# Allegro board Receiver2.brd
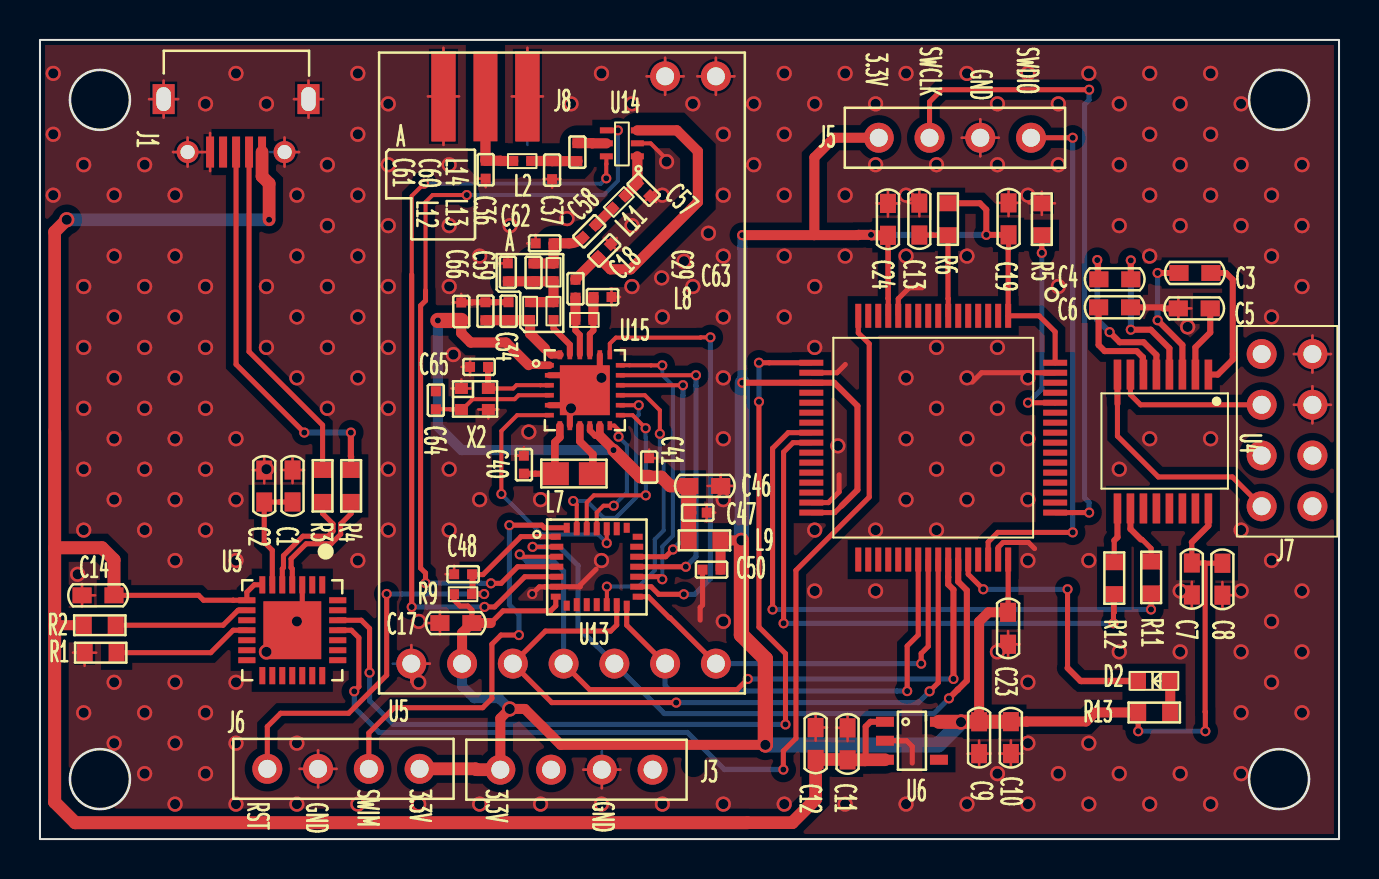
[diagram p0: board, top side]
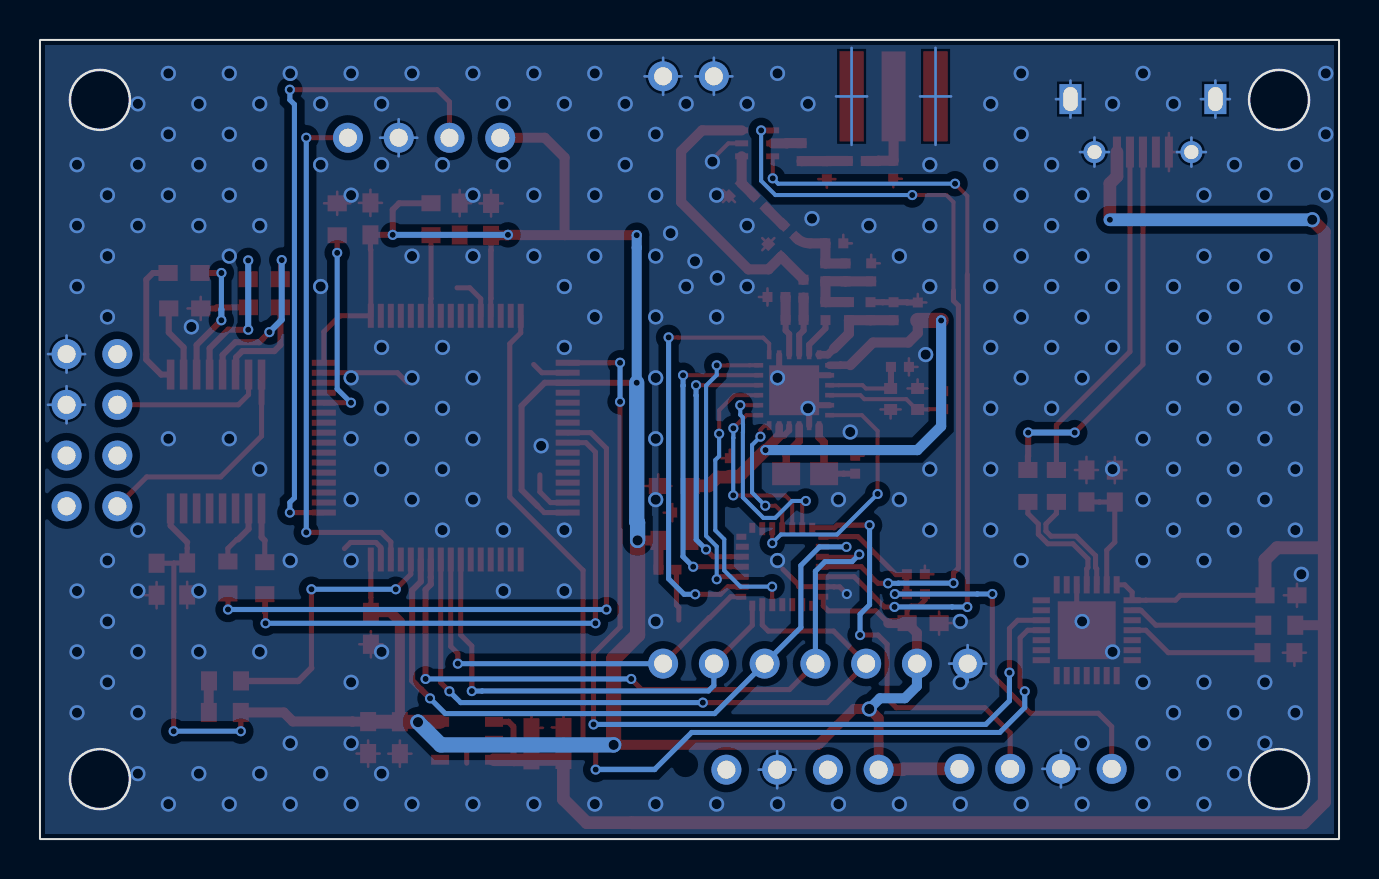
[diagram p1: board, bottom side, seen from below]

Outline 65 x 40 mm; copper layers: TOP, BOTTOM. Coordinates in mm from the lower left corner of the outline.
Outline path: rectangle 0,0 65,40 ; circle c3,37 r1.5 ; circle c3,37 r1.5 ; circle c3,3 r1.5 ; circle c3,3 r1.5 ; circle c62,37 r1.5 ; circle c62,37 r1.5 ; circle c62,3 r1.5 ; circle c62,3 r1.5

## Design rules (mm)
net group D: nets D+ D-
net group RF_CLASS2: nets N99630 N99706 N99710 N99714 N99794 N99798 N99834 N99974 N100014

## Placement (name value [footprint] x y rotation side)
C1  4.7uF/10V  [C0603]  12.64 18.47 270 top
C2  0.1uF/10V  [C0603]  11.22 18.47 270 top
C3  0.1uF/10V  [C0603]  56.99 28.34 0 top
C4  0.1uF/10V  [C0603]  52.98 28.02 0 top
C5  0.1uF/10V  [C0603]  56.96 26.56 0 top
C6  0.1uF/10V  [C0603]  54.57 26.62 180 top
C7  10uF/10V  [C0603]  57.64 13.82 270 top
C8  0.1uF/10V  [C0603]  59.16 12.21 90 top
C9  10uF/10V  [C0603]  46.99 5.87 270 top
C10  0.1uF/10V  [C0603]  48.58 4.28 90 top
C11  10uF/10V  [C0603]  40.41 3.97 90 top
C12  0.1uF/10V  [C0603]  38.81 5.58 270 top
C13  0.1uF/10V  [C0603]  44 31.83 270 top
C14  10uF/10V  [C0603]  3.7 12.2 180 top
C17  0.1uF/10V  [C0603]  20.01 10.81 0 top
C18  GRM1555C1H1R0CA01  [C0402]  28.56 29.78 225 top
C19  0.1uF/10V  [C0603]  48.47 31.84 270 top
C23  0.1uF/10V  [C0603]  48.44 9.75 90 top
C24  0.1uF/10V  [C0603]  42.43 31.82 270 top
C29  GRM1555C1H4R7CA01#  [C0402]  26.8 27.1 90 top
C34  GRM1555C1H820GA01  [C0402]  23.44 26.87 270 top
C35  GRM1555C1H101JA01#  [C0402]  26.89 34.84 270 top
C36  NC  [C0402]  22.3 33.06 90 top
C37  NC  [C0402]  25.63 33.03 90 top
C40  GRM155R61A474KE15D  [C0402]  24.21 19.19 270 top
C41  GRM155R61A105KE15D  [C0402]  30.48 19.07 270 top
C46  10uF  [C0603]  34.06 17.68 180 top
C47  0.1uF  [C0402]  33.36 16.34 180 top
C48  47P  [C0402]  20.72 13.26 0 top
C50  0.1uF  [C0402]  33.15 13.48 0 top
C57  GRM1555C1H8R2BA01#  [C0402]  29.89 32.82 315 top
C58  GRM1555C1H101JA01  [C0402]  27.16 30.1 45 top
C59  GRM155R71C473KA01J  [C0402]  22.29 26.87 270 top
C60  GRM1555C1H3R6BA01D  [C0402]  24.69 28.81 270 top
C61  NC  [C0402]  23.41 28.82 270 top
C62  GRM1555C1H120GA01  [C0402]  24.8 29.82 0 top
C63  GRM1555C1H3R9BA01#  [C0402]  28.6 27.13 180 top
C64  8.2P  [C0402]  19.81 21.52 90 top
C65  8.2P  [C0402]  22.42 23.63 180 top
C66  GRM155R71C104KA88D  [C0402]  21.08 26.86 270 top
D2  F5F1  [LED0603]  56.54 7.92 180 top
J1  CON9  [MICROUSB]  8.51 34.39 0 top
J3  -  [CON4]  19 3.51 180 top
J5  -  [CON4]  41.97 35.1 0 top
J6  -  [CON4]  23.03 3.47 0 top
J7  HEADER 4X2  [CON4X2]  61.13 24.28 0 top
J8  ANT_SMA  [SMA-KE]  22.29 37.18 90 top
L2  CRCW04020000Z0ED  [R0402]  24.58 33.94 180 top
L7  MLZ2012M150W  [R0805]  25.76 18.29 0 top
L8  LQW15AN33NH00D  [R0402]  27.69 25.99 180 top
L9  33nH  [R0603]  34.05 14.95 180 top
L11  LQG15HN18NJ02D  [R0402]  28.65 31.57 45 top
L12  LQG15HS56NJ02D  [R0402]  24.52 26.88 270 top
L13  33nH  [R0402]  25.7 25.98 90 top
L14  LQG15HS8N2J02D  [R0402]  25.7 27.92 90 top
R1  10K  [R0603]  2.23 9.33 0 top
R2  10K  [R0603]  2.19 10.7 0 top
R3  49.9  [R0603]  14.14 16.88 90 top
R4  49.9  [R0603]  15.57 16.88 90 top
R5  100K  [R0603]  50.13 30.22 90 top
R6  10K  [R0603]  45.43 30.23 90 top
R9  10K  [R0402]  21.62 12.26 180 top
R11  0  [R0603]  55.6 12.29 90 top
R12  0  [R0603]  53.75 12.26 90 top
R13  1K  [R0603]  54.95 6.34 0 top
U3  -  [CP2102]  12.62 10.45 270 top
U4  sipex3232eeA  [SIPEX3232EE]  58.46 23.25 270 top
U5  -  [APC340]  18.58 8.78 180 top
U6  XC6234H331VR-G/TPS780330200DDCT  [SOT-23-5]  42.28 5.87 270 top
U10  STM32L431rct6  [LQFP-64]  44.7 20.09 270 top
U13  STM8L151G6U6  [QFN28_NOLEAD_0_5]  27.86 13.63 0 top
U14  PE4259  [SC-70]  29.89 34.17 180 top
U15  SX1268  [QFN4X4]  27.26 22.47 0 top
X2  EXS00A-CS06465  [2_0X1_6]  21.09 21.5 0 top

## Library data of the parts
C1-C6 C8 C10 C12 C13 C17-C19 C23 C24 C29 C34-C37 C40 C41 C46-C48 C50 C57-C66 = CAP NP
C7 C9 C11 C14 = CAP POL
D2 = F5F1_0
J1 = CON9
J3 J5 J6 = CON4
J7 = HEADER 4X2
J8 = ANT_SMA
L2 L7-L9 L11-L14 = INDUCTOR
R1-R6 R11 R12 = R
R9 R13 = RESISTOR
U3 = CP2012_8
U4 = sipex3232ee
U5 = APC340_0
U6 = XC6234H331VR_2
U10 = STM32L431rct6_0
U13 = STM8L151G6U6
U14 = PE4259
U15 = SX1268
X2 = CRY_0

## Footprints (pads in the part's own frame, mm; a bottom-side part is the same pattern mirrored in y, then rotated)
2_0X1_6
  rect 0.65x0.55 smd: 1(0,0) 2(1.35,0) 3(1.35,1.05) 4(0,1.05)
APC340
  round 1.5 hole 0.9: 1(0,0) 2(-2.54,0) 3(-5.08,0) 4(-7.62,0) 5(-10.16,0) 6(-12.7,0) 7(-15.24,0) 8(-15.24,-29.4) 9(-12.7,-29.4)
C0402
  rect 0.5x0.5 smd: 1(0,0) 2(0.9,0)
C0603
  rect 0.96x0.8 smd: 1(0,0) 2(1.6,0)
CON4
  round 1.5 hole 0.9: 1(0,0) 2(2.54,0) 3(5.08,0) 4(7.62,0)
CON4X2
  round 1.5 hole 0.9: 1(0,0) 2(0,-2.54) 3(0,-5.08) 4(0,-7.62) 5(2.54,-7.62) 6(2.54,-5.08) 7(2.54,-2.54) 8(2.54,0)
CP2102
  rect 0.86x0.3 smd: 1(-2.273,1.5) 2(-2.273,1) 3(-2.273,0.5) 4(-2.273,0) 5(-2.273,-0.5) 6(-2.273,-1) 7(-2.273,-1.5) 15(2.273,-1.5) 16(2.273,-1) 17(2.273,-0.5) 18(2.273,0) 19(2.273,0.5) 20(2.273,1) 21(2.273,1.5)
  rect 0.3x0.86 smd: 8(-1.5,-2.273) 9(-1,-2.273) 10(-0.5,-2.273) 11(0,-2.273) 12(0.5,-2.273) 13(1,-2.273) 14(1.5,-2.273) 22(1.5,2.273) 23(1,2.273) 24(0.5,2.273) 25(0,2.273) 26(-0.5,2.273) 27(-1,2.273) 28(-1.5,2.273)
  rect 2.9x2.9 smd: 29(0,0)
LED0603
  rect 0.8x0.96 smd: 1(0,0) 2(1.6,0)
LQFP-64
  rect 1.2x0.3 smd: 1(-6.1,3.75) 2(-6.1,3.25) 3(-6.1,2.75) 4(-6.1,2.25) 5(-6.1,1.75) 6(-6.1,1.25) 7(-6.1,0.75) 8(-6.1,0.25) 9(-6.1,-0.25) 10(-6.1,-0.75) 11(-6.1,-1.25) 12(-6.1,-1.75) 13(-6.1,-2.25) 14(-6.1,-2.75) 15(-6.1,-3.25) 16(-6.1,-3.75) 33(6.1,-3.75) 34(6.1,-3.25) 35(6.1,-2.75) 36(6.1,-2.25) 37(6.1,-1.75) 38(6.1,-1.25) 39(6.1,-0.75) 40(6.1,-0.25) 41(6.1,0.25) 42(6.1,0.75) 43(6.1,1.25) 44(6.1,1.75) 45(6.1,2.25) 46(6.1,2.75) 47(6.1,3.25) 48(6.1,3.75)
  rect 0.3x1.2 smd: 17(-3.75,-6.1) 18(-3.25,-6.1) 19(-2.75,-6.1) 20(-2.25,-6.1) 21(-1.75,-6.1) 22(-1.25,-6.1) 23(-0.75,-6.1) 24(-0.25,-6.1) 25(0.25,-6.1) 26(0.75,-6.1) 27(1.25,-6.1) 28(1.75,-6.1) 29(2.25,-6.1) 30(2.75,-6.1) 31(3.25,-6.1) 32(3.75,-6.1) 49(3.75,6.1) 50(3.25,6.1) 51(2.75,6.1) 52(2.25,6.1) 53(1.75,6.1) 54(1.25,6.1) 55(0.75,6.1) 56(0.25,6.1) 57(-0.25,6.1) 58(-0.75,6.1) 59(-1.25,6.1) 60(-1.75,6.1) 61(-2.25,6.1) 62(-2.75,6.1) 63(-3.25,6.1) 64(-3.75,6.1)
MICROUSB
  rect 0.4x1.55 smd: 1(2.6,0) 2(1.95,0) 3(1.3,0) 4(0.65,0) 5(0,0)
  round 1.1 hole 0.71: 6(-1.125,0) 7(3.725,0)
  rect 1.1x1.5 hole 0.72x1.2: 8(-2.325,2.65) 9(4.925,2.65)
QFN4X4
  rect 0.45x0.23 smd: 1(-1.775,1.25) 2(-1.775,0.75) 3(-1.775,0.25) 4(-1.775,-0.25) 5(-1.775,-0.75) 6(-1.775,-1.25) 13(1.775,-1.25) 14(1.775,-0.75) 15(1.775,-0.25) 16(1.775,0.25) 17(1.775,0.75) 18(1.775,1.25)
  rect 0.23x0.45 smd: 7(-1.25,-1.775) 8(-0.75,-1.775) 9(-0.25,-1.775) 10(0.25,-1.775) 11(0.75,-1.775) 12(1.25,-1.775) 19(1.25,1.775) 20(0.75,1.775) 21(0.25,1.775) 22(-0.25,1.775) 23(-0.75,1.775) 24(-1.25,1.775)
  rect 2.5x2.5 smd: 25(0,0)
QFN28_NOLEAD_0_5
  rect 0.5x0.3 smd: 1(-2.05,1.5) 7(-2.05,-1.5) 15(2.05,-1.5) 21(2.05,1.5)
  rect 0.65x0.3 smd: 2(-2,1) 3(-2,0.5) 4(-2,0) 5(-2,-0.5) 6(-2,-1) 16(2,-1) 17(2,-0.5) 18(2,0) 19(2,0.5) 20(2,1)
  rect 0.3x0.5 smd: 8(-1.5,-1.95) 14(1.5,-1.95) 22(1.5,1.95) 28(-1.5,1.95)
  rect 0.3x0.65 smd: 9(-1,-1.9) 10(-0.5,-1.9) 11(0,-1.9) 12(0.5,-1.9) 13(1,-1.9) 23(1,1.9) 24(0.5,1.9) 25(0,1.9) 26(-0.5,1.9) 27(-1,1.9)
R0402
  rect 0.5x0.5 smd: 1(0,0) 2(0.9,0)
R0603
  rect 0.8x0.96 smd: 1(0,0) 2(1.6,0)
R0805
  rect 1.4x1.15 smd: 1(0,0) 2(1.9,0)
SC-70
  rect 0.65x0.3 smd: 1(0,0) 2(0,-0.65) 3(0,-1.3) 4(1.55,-1.3) 5(1.55,-0.65) 6(1.55,0)
SIPEX3232EE
  rect 1.5x0.38 smd: 1(0,0) 2(0,-0.65) 3(0,-1.3) 4(0,-1.95) 5(0,-2.6) 6(0,-3.25) 7(0,-3.9) 8(0,-4.55) 9(6.7,-4.55) 10(6.7,-3.9) 11(6.7,-3.25) 12(6.7,-2.6) 13(6.7,-1.95) 14(6.7,-1.3) 15(6.7,-0.65) 16(6.7,0)
SMA-KE
  rect 4.5x1.2 smd: 1(0,0) 2(0,2.1) 3(0,-2.1) 4(0,2.1) 5(0,-2.1)
SOT-23-5
  rect 0.5x0.9 smd: 1(0,0) 2(0.95,0) 3(1.9,0) 4(1.9,2.7) 5(0,2.7)

## Nets
GND: C1.1 C2.1 C5.1 C6.1 C7.2 C8.1 C9.2 C10.1 C11.2 C12.1 C13.1 C14.2 C17.1 C18.1 C19.1 C23.1 C24.1 C34.1 C36.1 C37.1 C40.1 C41.1 C46.1 C47.1 C48.1 C50.1 C57.2 C59.1 C61.1 C62.1 C63.1 C65.2 C66.1 J1.5 J1.6 J1.7 J1.8 J1.9 J3.3 J5.3 J6.3 J7.7 J7.8 J8.2(GND#2) J8.3(GND#3) J8.4(GND#4) J8.5(GND#5) R1.1 R5.2 U3.3(GND#3) U3.29(GND#29) U5.1(GND#1) U5.8(GND#8) U5.9(GND#9) U6.2(VSSS) U10.12(VSSA/VREF) U10.18(VSS#18) U10.31(VSS#31) U10.47(VSS#47) U10.63(VSS#63) U13.6(VSS1) U14.2(GND) U15.2(GND#2) U15.5(GND#5) U15.8(GND#8) U15.20(GND#20) U15.25(GND#25) X2.2(G#2) X2.4(G#4)
VCC: C11.1 C12.2 C14.1 J1.1 R2.1 U3.7(REGIN) U3.8(VBUS) U6.1(VIN) U6.3(CE)
VCC_3.3V: C7.1 C8.2 C9.1 C10.2 C17.2 C19.2 C23.2 C24.2 C50.2 J3.1 J5.1 J6.1 L9.1 R6.2 R9.2 R13.1 U4.16(VCC) U5.2(VCC) U6.5(VOUT) U10.1(VBAT) U10.13(VDDA/VREF+) U10.19(VDD#19) U10.32(VDD#32) U10.48(VDD#48) U10.64(VDD#64) U13.7(VDD1)
VCC_RF: C41.2 C46.2 C47.2 C66.2 L9.2 U15.1(VDD_IN) U15.10(VBAT) U15.11(VBAT_IO)
BUSY: U13.27(PC6) U15.14(BUSY)
COM_RX: R12.1 U10.25(PC5)
COM_TX: R11.1 U10.24(PC4)
D+: R4.1 U3.4(D+)
D-: R3.1 U3.5(D-)
DIO1: U13.26(PC5) U15.13(DIO1)
DIO2: U13.25(PC4) U15.12(DIO2/DATA)
DIO3: U13.24(PC3) U15.6(DIO3)
LORA_A: U5.3(SET_A) U10.41(PA8) U13.13(PB1)
LORA_AUX: U5.6(AUX) U10.39(PC8) U13.14(PB2)
LORA_B: U5.7(SET_B) U10.40(PC9) U13.15(PB3)
LORA_RST: U13.12(PB0) U15.15(NRESET)
LORA_RXD: U5.4(RXD) U10.42(PA9) U13.3(PA3/UART1_RXD)
LORA_TXD: U5.5(TXD) U10.43(PA10) U13.2(PA2/UART1_TXD)
RS232_RX: J7.4 U4.8(R2IN)
RS232_TX: J7.2 U4.7(T2OUT)
RST: C48.2 J3.4 R9.1 U13.1(NRST)
RXD: U3.26(TXD) U10.17(PA3)
RXEN: U13.4(PA4) U14.4(CTRL)
SCLK: J5.2 U10.49(PA14)
SPI_MISO: U13.19(PB7/SPI_MISO) U15.16(MISO)
SPI_MOSI: U13.18(PB6/SPI_MOSI) U15.17(MOSI)
SPI_NSS: U13.16(PB4/SPI_NSS) U15.19(NSS)
SPI_SCK: U13.17(PB5/SPI_SCK) U15.18(SCK)
SWDIO: J5.4 U10.46(PA13)
SWIM: J3.2 U13.28(PA0)
TXD: U3.25(RXD) U10.16(PA2)
TXEN: U13.5(PA5) U14.6(VDD)
N58413: C1.2 C2.2 U3.6(VDD)
N58587: R1.2 U3.11(\S\U\S\P\E\N\D\)
N58599: R2.2 U3.9(RST)
N58623: J1.2 R3.2
N58627: J1.3 R4.2
N59257: D2.1(ANODE) R13.2
N59265: D2.2(CATHODE) U10.44(PA11)
N59291: C13.2 R6.1 U10.7(NRST)
N59847: R5.1 U10.60(PH3/BOOT0)
N76001: C3.2 U4.1(C1+)
N76005: C3.1 U4.3(C1-)
N76017: C4.2 U4.4(C2+)
N76021: C4.1 U4.5(C2-)
N76033: C5.2 U4.2(V1+)
N76041: C6.2 U4.6(V-)
N76125: R11.2 U4.10(T2IN)
N99610: L13.1 U15.23(RF_O)
N99630: C60.2 C61.2 L12.1 L13.2 L14.1
N99650: C34.2 C59.2 L12.2 U15.24(VR_PA)
N99706: C35.1 U14.5(RFC)
N99710: C35.2 C37.2 L2.1
N99714: C36.2 J8.1(ANT) L2.2
N99794: C18.2 C29.2 U14.3(RF2)
N99798: C29.1 L8.2 U15.22(RFI_N)
N99834: C63.2 L8.1 U15.21(RFI_P)
N99974: C58.1 C60.1 C62.2 L14.2
N100014: C57.1 L11.2 U14.1(RF1)
N100088: C58.2 L11.1
N100384: C64.1 U15.4(XTB) X2.1(IN)
N100412: C65.1 U15.3(XTA) X2.3(OUT)
N100434: L7.2 U15.9(DCC_SW)
N100454: C40.2 L7.1 U15.7(VREG)
N758171: R12.2 U4.9(R2OUT)

Pads without a net: C64 2; J1 4; J6 2 4; J7 1 3 5 6; U3 1 2 10 12 13 14 15 16 17 18 19 20 21 22 23 24 27 28; U4 11 12 13 14 15; U6 4; U10 2 3 4 5 6 8 9 10 11 14 15 20 21 22 23 26 27 28 29 30 33 34 35 36 37 38 45 50 51 52 53 54 55 56 57 58 59 61 62; U13 8 9 10 11 20 21 22 23

## Via types
v1: diameter 0.508, hole 0.305, TOP to BOTTOM, 75 vias
v2: diameter 0.762, hole 0.508, TOP to BOTTOM, 242 vias

## Routing (per net, layer and track width the routed paths; a pad name or vN(x,y) marks a point on that pad's centre or on a via; arc(x,y) is an arc through that point)
GND: length 200.6
  TOP w0.127: 10.64,18.47 C2.1 ; C2.1 11.22,19.13 ; C2.1 11.22,17.81 ; 63.67,23.35 J7.8 ; J7.8 63.67,25.21 ; J7.8 64.6,24.28 ; J7.8 62.74,24.28 ; 57.64,11.56 C7.2 ; C7.2 57.06,12.22 ; C7.2 57.64,12.88 ; C47.1 33.79,16.34 ; C47.1 33.36,16.77 ; C47.1 33.36,15.91 ; C63.1 29.03,27.13 ; C63.1 28.6,26.71 ; C63.1 28.6,27.56 ; 21.09,23.63 C65.2 ; C65.2 21.52,23.21 ; C65.2 21.52,24.06 ; X2.4 21.09,23.01 ; X2.4 21.59,22.55 ; X2.4 20.58,22.55 ; 63.67,20.81 J7.7 ; J7.7 62.74,21.74 ; J7.7 63.67,22.67 ; J7.7 64.6,21.74 ; 47.86,9.75 C23.1 ; C23.1 48.44,10.41 ; C23.1 48.44,9.09 ; C23.1 49.02,9.75 ; 30.48,19.49 C41.1 30.91,19.07 ; C5.1 56.96,27.14 ; C5.1 57.61,26.56 ; C5.1 56.96,25.98 ; C24.1 42.43,32.48 ; C24.1 42.43,31.16 ; C24.1 43.01,31.82 ; C24.1 41.85,31.82 ; 20.01,10.23 C17.1 ; C17.1 20.01,11.39 ; C17.1 19.35,10.81 ; 31.28,37.25 U5.9 ; U5.9 32.21,38.18 ; U5.9 30.35,38.18 ; U5.9 31.28,39.11 ; C8.1 59.74,12.21 ; C8.1 59.16,11.55 ; C8.1 59.16,12.86 ; U5.1 18.58,9.71 ; U5.1 18.58,7.85 ; U5.1 19.51,8.78 ; J6.3 29.04,3.47 ; J6.3 27.19,3.47 ; J6.3 28.11,2.54 ; 23.78,19.19 C40.1 24.21,19.62 ; 25.63,32.61 C37.1 ; C37.1 25.2,33.03 ; C37.1 26.05,33.03 ; J1.7 12.24,35.12 ; J1.7 12.97,34.39 ; J1.7 12.24,33.66 ; 39.83,5.57 C11.2 ; C11.2 40.41,4.91 ; C11.2 40.41,6.22 ; 49.47,31.82 R5.2 ; R5.2 50.13,31.25 ; R5.2 50.79,31.82 ; R5.2 50.13,32.4 ; C18.1 28.86,29.48 ; C18.1 28.25,30.08 ; C18.1 28.86,30.08 ; 12.99,3.51 J3.3 ; J3.3 13.92,4.44 ; J3.3 13.92,2.59 ; J3.3 14.84,3.51 ; 2.1,11.62 C14.2 ; C14.2 2.1,12.78 ; C14.2 2.76,12.2 ; J1.9 13.44,37.97 ; J1.9 13.44,36.11 ; J1.9 14.17,37.04 ; J1.9 12.71,37.04 ; 20.29,13.26 C48.1 20.72,13.68 ; 22.98,28.82 C61.1 23.41,29.25 ; 12.64,17.82 C1.1 ; C1.1 12.06,18.47 ; C1.1 12.64,19.13 ; C1.1 13.22,18.47 ; 19.41,37.18 J8.2 ; J8.2 20.19,34.75 ; J8.2 20.97,37.18 ; J8.2 20.19,39.6 ; 44,31.18 C13.1 ; C13.1 43.42,31.83 ; C13.1 44,32.49 ; C19.1 49.04,31.84 ; C19.1 47.89,31.84 ; C19.1 48.47,32.5 ; C19.1 48.47,31.19 ; 22.3,32.63 C36.1 21.87,33.06 ; C57.2 30.83,31.88 ; C57.2 30.22,31.88 ; C57.2 30.83,32.49 ; 21.08,27.29 C66.1 20.65,26.86 ; 24.38,29.82 C62.1 24.8,30.25 ; R1.1 2.81,9.33 ; R1.1 1.66,9.33 ; R1.1 2.23,8.67 ; 48,4.28 C10.1 ; C10.1 48.58,3.62 ; C10.1 48.58,4.94 ; C10.1 49.16,4.28 ; C46.1 34.06,18.25 ; C46.1 33.4,17.68 ; C46.1 34.72,17.68 ; C46.1 34.06,17.1 ; 46.12,35.1 J5.3 ; J5.3 47.05,36.03 ; J5.3 47.05,34.18 ; J5.3 47.98,35.1 ; U5.8 34.75,38.18 ; U5.8 32.89,38.18 ; U5.8 33.82,39.11 ; U5.8 33.82,37.25 ; 8.51,33.44 J1.5 ; J1.5 8.13,34.39 ; J1.5 8.51,35.34 ; J1.6 8.12,34.39 ; J1.6 7.39,33.66 ; J1.6 6.66,34.39 ; J1.6 7.39,35.12 ; C9.2 47.57,4.27 ; C9.2 46.41,4.27 ; C9.2 46.99,3.61 ; C9.2 46.99,4.93 ; J1.8 6.19,37.97 ; J1.8 5.46,37.04 ; J1.8 6.92,37.04 ; J1.8 6.19,36.11 ; 23.61,37.18 J8.3 ; J8.3 24.39,39.6 ; J8.3 25.17,37.18 ; 21.93,21.5 X2.2 ; X2.2 22.44,21.05 ; X2.2 22.94,21.5 ; C12.1 38.81,6.24 ; C12.1 38.81,4.93 ; C12.1 39.39,5.58
  TOP w0.203: U14.2 30.56,34.82 31.21,34.17
  TOP w0.254: U10.63 47.11,23.34 46.64,22.87 ; 40.3,23.76 39.88,23.34 U10.18 ; U6.2 43.36,4.92 43.65,4.64 43.65,3.8 ; 44.13,27.59 43.49,27.59 42.95,27.05 U10.12 ; U10.47 47.95,14.6 48.19,14.85 49.46,14.85 49.77,14.54 ; U3.3 13.12,10.95 U3.29 ; C50.1 33.15,11.71 33.03,11.59 33.03,10.96 ; 39.99,18.23 39.99,17.38 39.45,16.84 U10.31 ; 27.83,13.5 27.03,12.71 27.03,12.63 U13.6 25.28,12.63 25.27,12.62 24.99,12.62 v1(24.63,12.27)
  TOP w0.305: 26.51,21.72 U15.8 ; 26.51,21.72 U15.5 ; 26.51,21.72 U15.25 ; U15.25 26.51,23.22 U15.2 ; U15.25 28.01,23.22 U15.20 ; C5.1 56.2,26.56 56.14,26.62 C6.1 ; C34.1 22.82,26.87 22.82,26.87 C59.1 21.62,26.87 21.61,26.86 C66.1
  BOTTOM w0.127: 62.74,24.28 J7.8 ; J7.8 63.67,25.21 ; J7.8 63.67,23.35 ; J7.8 64.6,24.28 ; 63.67,20.81 J7.7 ; J7.7 64.6,21.74 ; J7.7 62.74,21.74 ; J7.7 63.67,22.67 ; U5.1 19.51,8.78 ; U5.1 17.65,8.78 ; U5.1 18.58,7.85 ; U5.1 18.58,9.71 ; 13.92,2.59 J3.3 ; J3.3 13.92,4.44 ; J3.3 12.99,3.51 ; J3.3 14.84,3.51 ; J1.7 12.97,34.39 ; J1.7 12.24,33.66 ; J1.7 12.24,35.12 ; J1.7 11.51,34.39 ; 6.19,36.11 J1.8 ; J1.8 6.92,37.04 ; J1.8 6.19,37.97 ; J1.8 5.46,37.04 ; 46.12,35.1 J5.3 ; J5.3 47.98,35.1 ; J5.3 47.05,34.18 ; J5.3 47.05,36.03 ; 20.19,34.75 J8.2 ; J8.2 19.41,37.18 ; J8.2 20.97,37.18 ; J8.2 20.19,39.6 ; J1.9 14.17,37.04 ; J1.9 13.44,37.97 ; J1.9 13.44,36.11 ; J1.9 12.71,37.04 ; 24.39,34.75 J8.3 ; J8.3 23.61,37.18 ; J8.3 25.17,37.18 ; J8.3 24.39,39.6 ; 7.39,33.66 J1.6 ; J1.6 6.66,34.39 ; J1.6 7.39,35.12 ; J1.6 8.12,34.39 ; 33.82,37.25 U5.8 ; U5.8 34.75,38.18 ; U5.8 33.82,39.11 ; U5.8 32.89,38.18 ; 28.11,2.54 J6.3 ; J6.3 29.04,3.47 ; J6.3 27.19,3.47 ; J6.3 28.11,4.4 ; U5.9 32.21,38.18 ; U5.9 30.35,38.18 ; U5.9 31.28,39.11 ; U5.9 31.28,37.25
  vias: v2(0.66,38.33) v2(0.66,35.28) v2(0.66,32.23) v2(1.89,13.25) v2(2.19,33.75) v2(2.19,27.66) v2(2.19,24.61) v2(2.19,21.56) v2(2.19,18.51) v2(2.19,15.47) v2(2.19,6.32) v2(3.71,32.23) v2(3.71,29.18) v2(3.71,26.13) v2(3.71,23.09) v2(3.71,20.04) v2(3.71,16.99) v2(3.71,7.85) v2(3.71,4.8) v2(5.24,33.75) v2(5.24,27.66) v2(5.24,24.61) v2(5.24,21.56) v2(5.24,18.51) v2(5.24,15.47) v2(5.24,6.32) v2(5.24,3.27) v2(6.76,32.23) v2(6.76,29.18) v2(6.76,26.13) v2(6.76,23.09) v2(6.76,20.04) v2(6.76,16.99) v2(6.76,13.94) v2(6.76,7.85) v2(6.76,4.8) v2(6.76,1.75) v2(8.28,36.8) v2(8.28,27.66) v2(8.28,24.61) v2(8.28,21.56) v2(8.28,18.51) v2(8.28,15.47) v2(8.28,6.32) v2(8.28,3.27) v2(9.81,38.33) v2(9.81,20.04) v2(9.81,16.99) v2(9.81,13.94) v2(9.81,7.85) v2(9.81,4.8) v2(9.81,1.75) v2(11.33,36.8) v2(11.33,27.66) v2(11.33,24.61) v2(11.33,18.51) v2(11.33,9.37) v2(12.86,32.23) v2(12.86,29.18) v2(12.86,26.13) v2(12.86,23.09) v2(12.86,10.89) v2(12.86,4.8) v2(12.86,1.75) v2(14.38,33.75) v2(14.38,30.71) v2(14.38,27.66) v2(14.38,24.61) v2(14.38,21.56) v2(15.9,38.33) v2(15.9,35.28) v2(15.9,32.23) v2(15.9,29.18) v2(15.9,26.13) v2(15.9,23.09) v2(15.9,13.94) v2(15.9,1.75) v2(17.43,36.8) v2(17.43,33.75) v2(17.43,30.71) v2(17.43,27.66) v2(17.43,24.61) v2(17.43,21.56) v2(17.43,18.51) v2(17.43,15.47) v2(18.95,10.89) v2(18.95,7.85) v2(18.95,1.75) v2(20.48,33.75) v2(20.48,30.71) v2(20.48,27.66) v2(20.48,18.51) v2(20.48,15.47) v2(20.68,24.25) v2(22,29.18) v2(22,16.99) v2(22,1.75) v2(23.52,30.71) v2(24.46,20.38) v2(25.05,16.99) v2(25.05,1.75) v2(26.37,31.06) v2(26.57,36.8) v2(26.57,21.56) v2(28.1,38.33) v2(28.1,23.09) v2(28.1,13.94) v2(28.1,1.75) v2(29.62,36.8) v2(29.62,30.71) v2(29.62,27.66) v2(31.14,32.23) v2(31.11,28.09) v2(31.14,26.13) v2(31.14,1.75) v2(31.35,33.91) v2(32.23,28.92) v2(32.67,36.8) v2(32.67,27.66) v2(33.45,30.33) v2(34.19,35.28) v2(34.19,32.23) v2(34.19,29.18) v2(34.19,26.13) v2(34.19,23.09) v2(34.19,20.04) v2(34.19,16.99) v2(34.19,10.89) v2(34.19,1.75) v2(35.72,36.8) v2(35.72,33.75) v2(37.24,38.33) v2(37.24,35.28) v2(37.24,32.23) v2(37.24,29.18) v2(37.24,26.13) v2(37.24,1.75) v2(38.76,36.8) v2(38.76,27.66) v2(38.76,24.61) v2(38.76,15.47) v2(38.76,12.42) v2(39.92,19.68) v2(40.29,38.33) v2(40.29,32.23) v2(40.29,29.18) v2(40.29,1.75) v2(41.81,36.8) v2(41.81,33.75) v2(41.81,15.47) v2(41.81,12.42) v2(43.34,38.33) v2(43.34,32.23) v2(43.34,29.18) v2(43.34,23.09) v2(43.34,20.04) v2(43.34,16.99) v2(43.34,1.75) v2(44.86,33.75) v2(44.86,24.61) v2(44.86,21.56) v2(44.86,18.51) v2(44.86,15.47) v2(46.38,38.33) v2(46.38,29.18) v2(46.38,23.09) v2(46.38,20.04) v2(46.38,16.99) v2(46.38,1.75) v2(47.91,36.8) v2(47.91,33.75) v2(47.91,24.61) v2(47.91,21.56) v2(47.91,18.51) v2(47.91,9.37) v2(47.91,3.27) v2(49.43,38.33) v2(49.43,32.23) v2(49.43,23.09) v2(49.43,20.04) v2(49.43,16.99) v2(49.43,13.94) v2(49.43,7.85) v2(49.43,4.8) v2(49.43,1.75) v2(50.96,36.8) v2(50.96,33.75) v2(50.96,27.66) v2(50.96,3.27) v2(52.48,38.33) v2(52.48,13.94) v2(52.48,4.8) v2(52.48,1.75) v2(54,36.8) v2(54,33.75) v2(54,30.71) v2(54,18.51) v2(54,9.37) v2(54,3.27) v2(55.53,38.33) v2(55.53,35.28) v2(55.53,32.23) v2(55.53,29.18) v2(55.53,20.04) v2(55.53,1.75) v2(57.05,36.8) v2(57.05,33.75) v2(57.05,30.71) v2(57.05,12.42) v2(57.05,9.37) v2(57.05,3.27) v2(57.43,25.64) v2(58.58,38.33) v2(58.58,35.28) v2(58.58,32.23) v2(58.58,20.04) v2(58.58,1.75) v2(60.1,36.8) v2(60.1,33.75) v2(60.1,30.71) v2(60.1,15.47) v2(60.1,12.42) v2(60.1,9.37) v2(60.1,6.32) v2(60.1,3.27) v2(61.62,32.23) v2(61.62,29.18) v2(61.62,26.13) v2(61.62,13.94) v2(61.62,10.89) v2(61.62,7.85) v2(63.15,33.75) v2(63.15,30.71) v2(63.15,27.66) v2(63.15,12.42) v2(63.15,9.37) v2(63.15,6.32)
VCC: length 104.9
  TOP w0.254: U3.7 10.72,12.73 10.35,12.36 U3.8 9.67,11.95 9.66,11.96 8.18,11.96 7.94,12.2 C14.1 ; R2.1 2.19,10.78
  TOP w0.3: U6.1 41.55,5.87 41.31,5.63 41.31,3.99 41.29,3.97
  TOP w0.5: 0.73,10.67 0.76,10.7 R2.1
  TOP w0.635: v2(1.34,31) 0.73,30.39 0.73,20.41 ; J1.1 11.11,33.17 11.47,32.82 v1(11.47,31) ; 35.4,0.82 37.64,0.82 38.81,1.99 C12.2 40.39,3.98 C11.1 41.29,3.97 41.29,3.97 U6.3
  TOP w0.65: 0.73,14.56 0.75,14.58 3.1,14.58 3.7,13.98 C14.1 ; 0.73,14.56 0.73,20.41 ; 0.73,14.56 0.73,1.85 1.76,0.82 35.4,0.82
  BOTTOM w0.635: v2(1.34,31) v1(11.47,31)
VCC_3.3V: length 162.7
  TOP w0.254: R9.2 20.72,11.96 21.02,11.66 21.41,11.66 21.61,11.46 C17.2 ; C23.2 48.44,12.08 48.45,12.09 U10.48 ; 58.3,13.81 58.29,13.82 C7.1 57.64,14.55 57.63,14.55 57.63,14.85 ; 58.3,13.81 58.3,6.37 58.31,6.36 v1(58.31,5.4) ; 58.3,13.81 C8.2 ; 42.43,29.49 42.45,29.47 42.45,27.05 ; 42.43,29.49 C24.2 ; 42.43,29.49 42.43,27.06 42.45,27.05 ; C19.2 48.47,29.51 48.45,29.49 U10.1 49.99,26.19 50.8,25.39 U10.64 ; 40.11,16.68 39.77,16.34 U10.32 ; 22.56,10.81 23.17,11.42 25.56,11.42 25.81,11.68 U13.7 ; 42.45,27.05 U10.13 ; R13.1 v1(54.95,5.4)
  TOP w0.3: v1(35.14,22.84) U10.19 39.74,22.84 40.9,21.68 40.9,17.48 40.11,16.68 ; C19.2 v1(47.35,30.24) 47.35,31.5 47.03,31.83 R6.2
  TOP w0.305: 57.63,14.85 58.46,15.68 U4.16
  TOP w0.5: 38.74,30.23 40.94,30.23 40.95,30.24 v1(41.58,30.24) 41.61,30.22 C24.2 ; 38.74,30.23 38.75,30.24 38.75,34.12 39.74,35.1 J5.1 ; 38.74,30.23 v1(35.14,30.23) ; 46.07,5.87 v2(46.09,5.85) ; R13.1 52.8,6.34 52.35,5.89 49.37,5.89 49.36,5.88 C10.2 ; U5.2 21.12,10.32 C17.2 22.56,10.81 ; v2(36.3,4.71) 26.06,4.71 24.26,6.51 v2(23.51,6.51) 23.03,6.04 J6.1 ; v2(35.1,14.95) L9.1 C50.2 ; C23.2 47.46,11.35 46.99,10.88 C9.1
  TOP w0.635: J6.1 21.84,3.47 21.8,3.51 J3.1
  TOP w0.7: U6.5 46.11,5.87 46.11,5.87 C9.1 48.58,5.87 C10.2
  TOP w0.762: v2(35.1,14.95) 35.1,10.22 36.3,9.02 v2(36.3,4.71)
  BOTTOM w0.254: v1(54.95,5.4) v1(58.31,5.4)
  BOTTOM w0.3: v1(47.35,30.24) v1(41.58,30.24)
  BOTTOM w0.5: v2(23.51,6.51) 22.97,7.05 21.73,7.05 21.12,7.65 U5.2 ; v1(35.14,30.23) 35.14,29.6 35.14,29.6 v1(35.14,22.84)
  BOTTOM w0.762: v2(35.1,14.95) 35.1,15.84 35.14,15.88 v1(35.14,22.84) ; v2(46.09,5.85) 44.95,4.71 v2(36.3,4.71)
VCC_RF: length 31.5
  TOP w0.305: 28.01,20.18 28,20.19 27.78,20.19 27.51,20.46 U15.10
  TOP w0.381: 24.45,23.72 24.94,23.72 24.95,23.72 U15.1 ; 28.01,20.18 U15.11
  TOP w0.508: 24.45,23.72 23.32,24.85 21.55,24.85 21.08,25.33 C66.2 ; v1(28.7,19.47) 28.7,19.49 28.01,20.18
  TOP w0.635: v1(28.7,19.47) 30,18.17 ; 30,18.17 C41.2 ; 30,18.17 30.05,18.12 31.09,18.12 31.54,17.68 C46.2
  TOP w0.762: C46.2 C47.2 32.45,16.33 L9.2 ; C66.2 v1(19.91,25.96)
  BOTTOM w0.508: v1(28.7,19.47) 21.1,19.47 19.91,20.66 v1(19.91,25.96)
BUSY: length 11
  TOP w0.203: v1(29.96,21.72) U15.14 ; v1(26.68,16.92) 26.86,16.74 U13.27
  BOTTOM w0.203: v1(26.68,16.92) 27.37,16.92 28.21,16.08 28.8,16.08 29.83,17.1 29.83,20.36 29.82,20.36 29.82,20.76 29.83,20.77 29.83,21.1 29.96,21.23 v1(29.96,21.72)
COM_RX: length 29.1
  TOP w0.254: 53.71,11.31 53.71,12.23 53.74,12.26 ; 53.71,11.31 53.75,11.35 R12.1 ; 53.71,11.31 v1(53.71,10.8) ; U10.25 37.68,19.84 37.21,19.37 v1(37.21,10.8)
  BOTTOM w0.254: v1(37.21,10.8) v1(53.71,10.8)
COM_TX: length 30.1
  TOP w0.254: v1(36.66,11.49) 36.66,19.56 37.44,20.34 U10.24 ; R11.1 55.6,11.5 v1(55.59,11.49)
  BOTTOM w0.254: v1(36.66,11.49) v1(55.59,11.49)
D+: length 6.2
  TOP w0.254: U3.4 12.62,13.53 12.56,13.59 12.56,14.03 13.32,14.78 14.57,14.78 15.04,15.26 15.04,15.77 15.57,16.3 R4.1
D-: length 6.2
  TOP w0.254: R3.1 14.14,16.3 14.66,15.77 14.66,15.41 14.41,15.16 13.16,15.16 12.18,14.18 12.18,13.59 12.12,13.53 U3.5
DIO1: length 9.3
  TOP w0.203: U15.13 29.65,21.22 v1(30.3,20.56) ; v1(30.31,17.2) 27.71,17.2 27.36,16.85 U13.26
  BOTTOM w0.203: v1(30.31,17.2) 30.31,20.07 30.3,20.08 v1(30.3,20.56)
DIO2: length 6.6
  TOP w0.203: U13.25 27.86,16.35 28.2,16.69 v1(28.71,16.69) ; U15.12 28.52,20.7 28.74,20.7 28.95,20.49 v1(28.95,20.14)
  BOTTOM w0.203: v1(28.71,16.69) 29.37,17.35 29.37,19.72 v1(28.95,20.14)
DIO3: length 12.9
  TOP w0.203: U13.24 v1(28.36,14.81) ; U15.6 23.87,21.22 23.09,20.43 v1(23.09,17.27)
  BOTTOM w0.203: v1(28.36,14.81) 27.92,15.25 25.11,15.25 v1(23.09,17.27)
LORA_A: length 35.7
  TOP w0.254: v1(44.51,7.4) 44.95,7.83 U10.41 ; U13.13 28.86,10.71 28.56,10.41 25.29,10.41 U5.3 25.61,6.83 v1(31.83,6.83)
  BOTTOM w0.254: v1(31.83,6.83) 43.95,6.83 v1(44.51,7.4)
LORA_AUX: length 23.8
  TOP w0.254: U13.14 29.36,10.7 U5.6 ; v1(43.39,7.41) 43.39,9.66 43.95,10.22 U10.39
  BOTTOM w0.254: U5.6 31.28,7.69 31.55,7.41 42.88,7.41 42.88,7.41 v1(43.39,7.41)
LORA_B: length 20.9
  TOP w0.254: v1(44.09,8.78) 44.09,9.29 44.45,9.64 U10.40 ; U13.15 30.44,12.13 31.49,11.08 31.52,11.08 U5.7
  BOTTOM w0.254: U5.7 v1(44.09,8.78)
LORA_RST: length 14.2
  TOP w0.203: U13.12 28.37,11.74 v1(28.37,12.63) ; U15.15 30.27,22.22 31.02,21.47 v1(31.02,20.29)
  BOTTOM w0.203: v1(28.37,12.63) 29.95,12.63 30.76,13.45 30.76,15.01 31.21,15.45 31.21,18.97 31.02,19.17 v1(31.02,20.29)
LORA_RXD: length 35.5
  TOP w0.203: U13.3 24.12,14.13
  TOP w0.254: 45.75,8.05 45.71,8.01 v1(45.71,8.01) ; 24.12,14.13 v1(24.01,14.25) ; U5.4 27.5,7.48 34.88,7.48 v1(35.42,8.01)
  TOP w0.305: U10.42 45.45,13.11 45.45,12.74 45.71,12.48 v1(45.71,8.01)
  BOTTOM w0.254: v1(24.01,14.25) 24.36,13.89 25.72,13.89 26.2,13.41 U5.4 ; v1(45.71,8.01) v1(35.42,8.01)
LORA_TXD: length 35.1
  TOP w0.203: v1(24.65,14.63) 25.25,14.63 25.26,14.63 U13.2
  TOP w0.305: U10.43 45.95,12.88 46.38,12.45 46.38,7.93 45.93,7.48 45.92,7.48 v1(45.48,7.04)
  BOTTOM w0.254: v1(24.65,14.63) 25.99,14.63 26.93,13.69 26.93,10.59 U5.5 31.24,6.28 44.72,6.28 v1(45.48,7.04)
RS232_RX: length 11.7
  TOP w0.254: J7.4 59.66,18.13 55.96,18.13 53.91,20.17 53.91,21.8
  TOP w0.305: 53.91,21.8 U4.8
RS232_TX: length 7.8
  TOP w0.254: J7.2 55.07,21.74 54.56,22.25 U4.7
RST: length 26.2
  TOP w0.254: U13.1 25.04,15.13 25.03,15.14 24.07,15.14 22.17,13.24 21.66,13.24 21.66,12.26 v1(22.23,12.26) 22.22,12.26 R9.1 21.62,12.26 C48.2 ; v1(17.35,12.27) 17.35,8.2 15.44,6.3 12.04,6.3 11.38,5.63 J3.4
  BOTTOM w0.254: v1(17.35,12.27) 18.11,12.27 18.11,12.26 v1(22.23,12.26)
RXD: length 48
  TOP w0.254: U3.26 16.08,10.95 16.49,10.54 v1(16.49,8.33) ; U10.17 36.49,23.84 36.48,23.84 v1(35.98,23.84) ; v1(35.98,21.89) 35.98,10.61 37.3,9.28 v1(37.3,5.74)
  BOTTOM w0.254: v1(16.49,8.33) 16.49,6.92 17.67,5.74 v1(37.3,5.74) ; v1(35.98,21.89) v1(35.98,23.84)
RXEN: length 39.4
  TOP w0.203: 19.29,27.46 19.29,31.88 19.65,32.24 v1(21.36,32.24) ; v1(28.92,35.47) U14.4
  TOP w0.254: v1(22.57,12.8) 23.07,12.8 23.9,13.63 U13.4 ; v1(19.29,12.81) 19.29,13.32 19.04,13.56 19.04,26.7 19.29,26.95 19.29,27.46
  BOTTOM w0.203: v1(21.36,32.24) 28.2,32.24 28.92,32.95 v1(28.92,35.47)
  BOTTOM w0.254: v1(22.57,12.8) 22.06,12.8 22.05,12.81 v1(19.29,12.81)
SCLK: length 33.1
  TOP w0.254: J5.2 44.51,36.9 45.12,37.51 v1(52.5,37.51) ; v1(52.5,16.34) 51.65,16.34 51.65,16.34 U10.49
  BOTTOM w0.254: v1(52.5,37.51) 52.5,37 52.27,36.77 52.27,17.08 52.5,16.85 v1(52.5,16.34)
SPI_MISO: length 13.5
  TOP w0.203: U15.16 v1(32.17,22.72)
  TOP w0.254: U13.19 30.44,14.13 30.44,14.13 31.31,14.13 v1(31.67,14.5)
  BOTTOM w0.254: v1(32.17,22.72) 32.17,22.21 32.16,22.2 32.16,14.99 v1(31.67,14.5)
SPI_MOSI: length 16
  TOP w0.203: U15.17 v1(32.82,23.22)
  TOP w0.254: v1(32.32,13.63) 30.44,13.63 30.44,13.63 U13.18
  BOTTOM w0.254: v1(32.82,23.22) 32.82,22.7 32.83,22.7 32.83,14.14 v1(32.32,13.63)
SPI_NSS: length 22
  TOP w0.203: v1(33.55,25.11) 33.06,25.11 33.05,25.1 28.82,25.1 28.51,24.8 U15.19
  TOP w0.254: v1(32.22,12.25) 30.96,12.25 30.58,12.63 U13.16
  BOTTOM w0.254: v1(33.55,25.11) 33.55,13.03 32.77,12.25 v1(32.22,12.25)
SPI_SCK: length 14.6
  TOP w0.203: U15.18 29.49,23.72 29.49,23.72 30.57,23.72 30.57,23.71 v1(31.14,23.71)
  TOP w0.254: U13.17 30.44,13.13 30.44,13.13 31.01,13.13 v1(31.14,13)
  BOTTOM w0.203: v1(31.14,23.71) 31.14,23.23 31.67,22.7 31.67,15.18 31.14,14.64 v1(31.14,13)
SWDIO: length 27.1
  TOP w0.254: v1(51.68,15.35) 47.93,15.35 47.44,14.87 47.44,13.99 U10.46 ; J5.4 v1(51.68,35.1)
  BOTTOM w0.254: v1(51.68,35.1) v1(51.68,15.35)
SWIM: length 21.5
  TOP w0.254: v1(23.96,10.21) 23.07,10.21 22.61,9.75 22.61,7.03 22.15,6.57 17.72,6.57 16.46,5.31 J3.2 ; U13.28 25.24,15.58 25.11,15.71 v1(23.49,15.71)
  BOTTOM w0.254: v1(23.49,15.71) 23.49,11.73 23.96,11.25 v1(23.96,10.21)
TXD: length 55.2
  TOP w0.254: v1(15.73,7.39) 15.96,7.62 15.96,10.08 15.58,10.45 U3.25 ; U10.16 40.95,25.34 41.49,24.79 41.49,17.12 37.83,13.45 37.83,5.04 37.19,4.41 v1(37.19,3.48)
  BOTTOM w0.254: v1(37.19,3.48) 34.25,3.48 34.24,3.49 ; v1(15.73,7.39) 15.73,6.58 16.97,5.34 32.39,5.34 34.24,3.49 ; 37.18,3.49 34.24,3.49
TXEN: length 39.7
  TOP w0.203: U14.6 28.34,33.8 28.34,33.79 v1(28.34,33.07) ; 18.6,28.25 18.6,32.19 v1(19.21,32.8)
  TOP w0.254: U13.5 24.26,13.13 22.75,11.62 v1(22.24,11.62) ; 18.6,28.25 v1(18.6,11.62)
  BOTTOM w0.203: v1(28.34,33.07) 28.06,32.8 v1(19.21,32.8)
  BOTTOM w0.254: v1(18.6,11.62) 19.36,11.62 19.36,11.62 v1(22.24,11.62)
N58413: length 5.7
  TOP w0.254: C1.2 11.98,16.87 11.98,16.87 C2.2 11.22,14.86 11.62,14.46 U3.6
N58587: length 7
  TOP w0.254: U3.11 9.67,10.45 8.54,9.33 R1.2
N58599: length 6.9
  TOP w0.254: U3.9 9.91,11.45 9.16,10.7 R2.2
N58623: length 17.4
  TOP w0.254: R3.2 14.14,20.72 10.46,24.4 J1.2
N58627: length 19.7
  TOP w0.254: v1(13.23,20.35) 9.81,23.76 J1.3
  TOP w0.305: v1(15.56,20.35) 15.56,19.17 15.57,19.15 R4.2
  BOTTOM w0.305: v1(13.23,20.35) v1(15.56,20.35)
N59257: length 3.1
  TOP w0.305: D2.1 56.55,7.91 R13.2
  TOP w0.5: R13.2 56.56,6.34 56.56,7.88
N59265: length 16.7
  TOP w0.254: v1(51.42,12.5) 51.42,8.56 ; 52.06,7.92 52.1,7.88 54.96,7.88 ; v1(47.2,12.5) 46.45,13.26 U10.44
  TOP w0.305: 51.42,8.56 52.06,7.92 D2.2
  BOTTOM w0.254: v1(47.2,12.5) v1(51.42,12.5)
N59291: length 5.5
  TOP w0.254: C13.2 44.69,30.23 44.7,30.23 R6.1 45.43,27.06 45.45,27.05 U10.7
N59847: length 10
  TOP w0.254: R5.1 v1(50.13,29.34) ; U10.60 v1(49.44,21.84)
  BOTTOM w0.254: v1(49.44,21.84) 50.13,22.53 v1(50.13,29.34)
N76001: length 6.8
  TOP w0.3: 59.68,24.28 59.68,28 59.35,28.34 C3.2
  TOP w0.305: 59.68,24.28 59.68,24 58.93,23.25 U4.1
N76005: length 6.7
  TOP w0.254: v1(55.92,28.34) 56.1,28.34
  TOP w0.3: 56.1,28.34 C3.1
  TOP w0.305: U4.3 57.16,24.73 v1(55.92,25.97)
  BOTTOM w0.254: 55.92,26.5 v1(55.92,28.34)
  BOTTOM w0.305: v1(55.92,25.97) 55.92,26.5 55.92,26.5
N76017: length 8
  TOP w0.3: C4.2 v1(54.58,28.97)
  TOP w0.305: v1(54.58,25.5) 55.58,25.5 56.51,24.56 U4.4
  BOTTOM w0.3: 54.58,25.57 v1(54.58,28.97)
  BOTTOM w0.305: v1(54.58,25.5) 54.58,25.57
N76021: length 8.7
  TOP w0.3: C4.1 52.94,28.06 52.94,28.94 v1(52.9,28.98)
  TOP w0.305: U4.5 55.86,24.23 55.22,24.87 54.03,24.87 v1(53.52,25.37)
  BOTTOM w0.3: 52.9,25.99 v1(52.9,28.98)
  BOTTOM w0.305: v1(53.52,25.37) 52.9,25.99
N76033: length 3.6
  TOP w0.305: C5.2 58.56,25.36 57.81,24.61 U4.2
N76041: length 5.2
  TOP w0.305: C6.2 52.97,24.73 53.28,24.42 54.88,24.42 55.19,24.11 55.19,23.28 U4.6
N76125: length 3.1
  TOP w0.254: R11.2 55.6,14.55 55.15,15 55.09,15
  TOP w0.305: U4.10 54.56,15.52 55.09,15
N99610: length 2.1
  TOP w0.305: U15.23 26.51,24.75 25.7,25.56 L13.1
N99630: length 4.5
  TOP w0.508: L12.1 25.7,26.88 L13.2 25.7,27.91 L14.1 24.7,27.92 C60.2 24.69,27.92 C61.2
N99650: length 4.8
  TOP w0.381: U15.24 25.58,24.24 25.27,24.55
  TOP w0.508: 25.27,24.55 24.52,25.3 L12.2 24.52,25.97 C34.2 23.44,25.97 C59.2
N99706: length 1.5
  TOP w0.508: U14.5 27.63,34.82 27.62,34.84 C35.1
N99710: length 2.3
  TOP w0.508: L2.1 25.62,33.94 C37.2 C35.2
N99714: length 4.6
  TOP w0.508: J8.1 22.29,33.97 C36.2 23.03,33.96 23.05,33.94 L2.2
N99794: length 14.3
  TOP w0.508: C29.2 26.8,28.02 C18.2 28.55,28.52 29.55,28.52 32.92,31.88 32.92,34.42 31.87,35.47 U14.3
N99798: length 3
  TOP w0.305: U15.22 27.01,25.24 26.79,25.46 L8.2
  TOP w0.508: L8.2 26.79,27.09 C29.1
N99834: length 3
  TOP w0.305: L8.1 27.69,25.46 27.51,25.28 U15.21
  TOP w0.508: L8.1 27.69,27.13 C63.2
N99974: length 3.5
  TOP w0.508: C60.1 25.69,28.81 L14.2 25.7,29.82 C62.2 26.47,29.82 arc(26.85,29.89) C58.1
N100014: length 2.2
  TOP w0.508: L11.2 29.28,32.22 C57.1 U14.1
N100088: length 1.2
  TOP w0.508: C58.2 27.82,30.74 L11.1
N100384: length 6
  TOP w0.203: C64.1 20.52,21.52 20.53,21.5 X2.1 ; U15.4 23.95,22.22 23.75,22.02 21.65,22.02 21.14,21.5
  TOP w0.254: 21.14,21.5 X2.1
N100412: length 4.2
  TOP w0.203: U15.3 25.03,22.72 25.03,22.72 23.84,22.72 23.68,22.55 X2.3
  TOP w0.305: X2.3 22.42,22.57 C65.1
N100434: length 2.7
  TOP w0.381: U15.9 27.01,19.91 27.66,19.25 L7.2
N100454: length 4.1
  TOP w0.305: C40.2 24.78,18.29 24.79,18.29 L7.1
  TOP w0.381: L7.1 25.76,19.86 26.01,20.11 U15.7
N758171: length 2.8
  TOP w0.254: 53.75,14.95 R12.2
  TOP w0.305: 53.75,14.95 53.91,15.11 U4.9

## Copper pours and planes (outline as drawn; the poured copper is in the pictures)
GND on TOP: 64.75,0.25 0.25,0.25 0.25,39.75 64.75,39.75 ; 13 cut-outs
GND on BOTTOM: 64.75,0.25 0.25,0.25 0.25,39.75 64.75,39.75 ; 2 cut-outs

## Text on the board
Ref Des/Silkscreen Top: A | RST | GND | SWIM | 3.3V | SWCLK | SWDIO
NCLEGEND-1-2: FIGURE | SIZE | 12.0 | 20.0 | 27.953 | 35.433 | 47.244x28.346 | DRILL CHART: TOP to BOTTOM | ALL UNITS ARE IN MILS | PLATED | QTY | 76 | 242 | 2 | 29
